# EAGLE board quahog-4-routed (EAGLE 7.6.0)
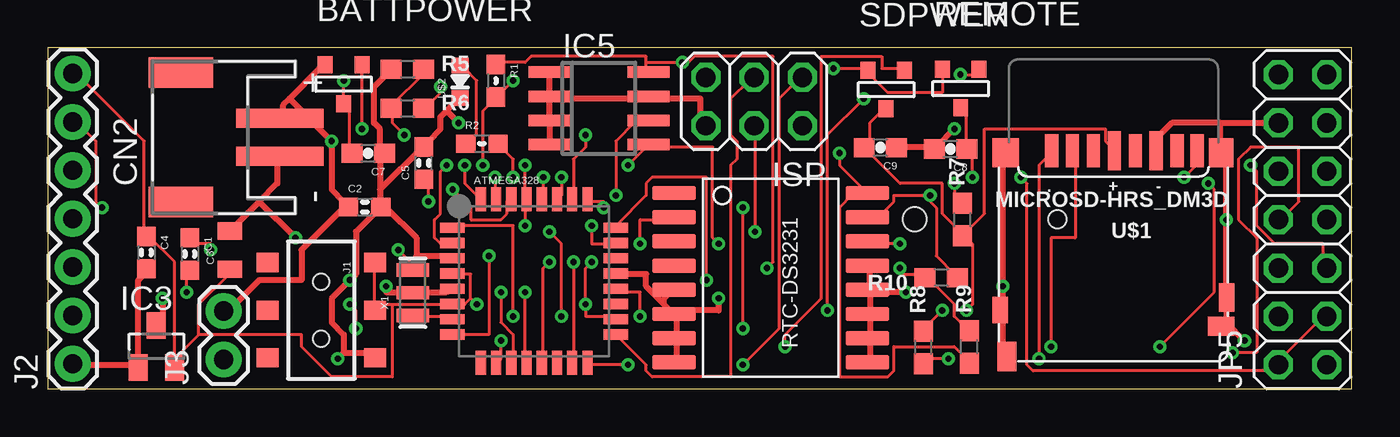
[diagram p0: board, top side]
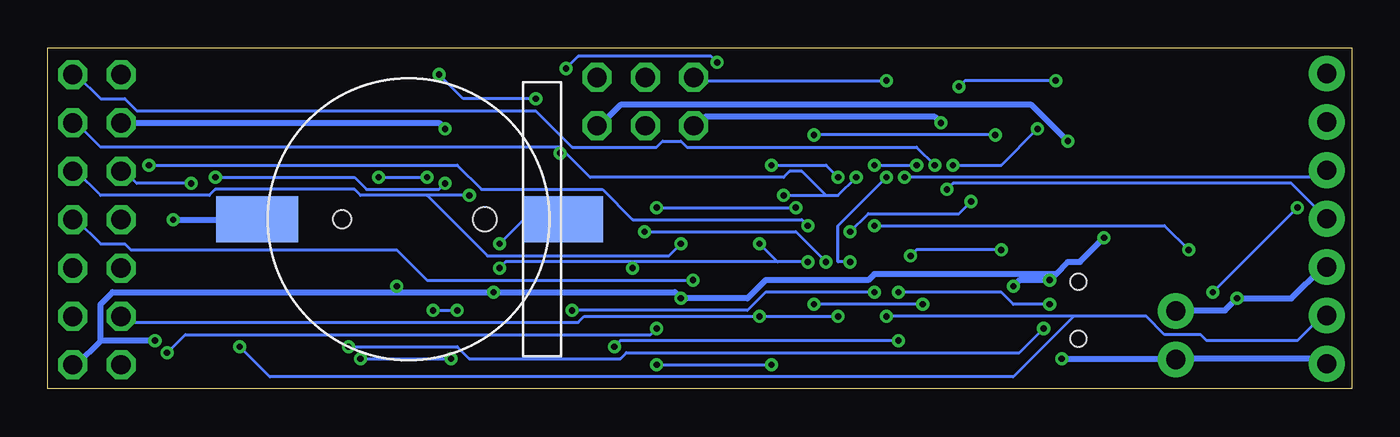
[diagram p1: board, bottom side, seen from below]

Size 68.5 x 17.92 mm. Coordinates in mm from the lower left corner, seen from the top.
Outline: 0,0 68.5,0 68.5,17.92 0,17.92 0,0
Copper layers (1*16): Top 0.0356mm / dielectric 1.5011mm / Bottom 0.0356mm
Design rules "oshpark-2layer": minimum track width 6mil, minimum drill 13mil, track to track 6mil, track to pad 6mil, pad to pad 6mil, via to via 6mil, smd to smd 6mil, copper to edge 15mil, drill to drill 6mil, minimum pad ring 7mil, minimum via ring 7mil, stop-mask expansion 2.5mil, vias tented up to drill 0mil, thermal gap 10mil
Net classes: 1 power: width 0.305 mm

## Footprints (pad centres in the part's own frame; a part is rotated, then mirrored left to right if it is on the bottom)
TQFP32-08 = smd 1.27 x 0.533: 1 -4.293,2.8; 2 -4.293,2; 3 -4.293,1.2; 4 -4.293,0.4; 5 -4.293,-0.4; 6 -4.293,-1.2; 7 -4.293,-2; 8 -4.293,-2.8; 17 4.293,-2.8; 18 4.293,-2; 19 4.293,-1.2; 20 4.293,-0.4; 21 4.293,0.4; 22 4.293,1.2; 23 4.293,2; 24 4.293,2.8 | smd 0.533 x 1.27: 9 -2.8,-4.293; 10 -2,-4.293; 11 -1.2,-4.293; 12 -0.4,-4.293; 13 0.4,-4.293; 14 1.2,-4.293; 15 2,-4.293; 16 2.8,-4.293; 25 2.8,4.293; 26 2,4.293; 27 1.2,4.293; 28 0.4,4.293; 29 -0.4,4.293; 30 -1.2,4.293; 31 -2,4.293; 32 -2.8,4.293
BATTCON_12MM_SMT = smd 2.4 x 4.3: P$1 0,11.96 | smd 2.4 x 4.2: P$2 0,-4.1 | hole 0.95: 0,7.5 | hole 1.25: 0,0
SOT-23 = smd 0.787 x 0.889: 1 0.025,-1.016; 2 -0.94,1.016; 3 0.991,1.016
0603-CAP = smd 1.016 x 0.965: 1 -0.85,0; 2 0.85,0
0805-CAP = smd 0.902 x 1.3: 1 -1,0; 2 1,0
0603-CAP' = smd 1.1 x 1: 1 -0.85,0; 2 0.85,0
JST-PH-2-SMT-RA = smd 1 x 4.6: 1 1,-3.7; 2 -1,-3.7 | smd 1.6 x 3.4: NC1 -3.4,1.5; NC2 3.4,1.5
SOT23 = smd 1 x 1.4: 1 -0.95,-1.1; 2 0.95,-1.1; 3 0,1.1
SO-08 = smd 0.6 x 2.2: 1 -1.905,-2.6; 2 -0.635,-2.6; 3 0.635,-2.6; 4 1.905,-2.6; 5 1.905,2.6; 6 0.635,2.6; 7 -0.635,2.6; 8 -1.905,2.6
2X03 = drill 1.016 octagon: 1 -2.54,-1.27; 2 -2.54,1.27; 3 0,-1.27; 4 0,1.27; 5 2.54,-1.27; 6 2.54,1.27
AYZ0202 = smd 1 x 1.15: 1 -2.5,2.825; 2 0,2.825; 3 2.5,2.825; 4 -2.5,-2.825; 5 0,-2.825; 6 2.5,-2.825 | hole 0.85: 1.5,0; -1.5,0
1X07 = drill 1.016 pad 1.88: 1 0,0; 2 2.54,0; 3 5.08,0; 4 7.62,0; 5 10.16,0; 6 12.7,0; 7 15.24,0
1X02 = drill 1.016 pad 1.88: 1 0,0; 2 2.54,0
2X07 = drill 1.016 octagon: 1 -7.62,-1.27; 2 -7.62,1.27; 3 -5.08,-1.27; 4 -5.08,1.27; 5 -2.54,-1.27; 6 -2.54,1.27; 7 0,-1.27; 8 0,1.27; 9 2.54,-1.27; 10 2.54,1.27; 11 5.08,-1.27; 12 5.08,1.27; 13 7.62,-1.27; 14 7.62,1.27
0603-RES = smd 1.016 x 0.965: 1 -0.85,0; 2 0.85,0
0603-NO = smd 1.1 x 1: 1 -0.85,0; 2 0.85,0
DS3231 = smd 0.762 x 2.286: 1 -4.445,-5.08; 2 -3.175,-5.08; 3 -1.905,-5.08; 4 -0.635,-5.08; 5 0.635,-5.08; 6 1.905,-5.08; 7 3.175,-5.08; 8 4.445,-5.08; 9 4.445,5.08; 10 3.175,5.08; 11 1.905,5.08; 12 0.635,5.08; 13 -0.635,5.08; 14 -1.905,5.08; 15 -3.175,5.08; 16 -4.445,5.08
DM3D = smd 0.7 x 1.75: CD/DAT3 8.15,0.45; CLK 4.85,0.45; CMD 7.05,0.45; DAT0 2.65,0.45; DAT1 1.6,0.45; DAT2 9.25,0.45 | smd 0.8 x 1.5: GND1 0.05,8.15 | smd 0.8 x 1.4: GND2 11.95,8.8 | smd 1.4 x 1.5: GND3 11.65,0.55 | smd 1.3 x 1.5: GND4 0.35,0.55 | smd 1 x 1.55: SW_A 11.6,11.25 | smd 1.4 x 1: SW_B 0.35,9.65 | smd 0.7 x 2.032: VDD 5.95,0.45; VSS 3.75,0.45
0603-LED = smd 0.8 x 0.9: MINUS -0.85,0; PLUS 0.85,0
RESONATOR-SMD = smd 0.7 x 1.7: 1 -1.2,0; 2 0,0; 3 1.2,0

## Placement (x,y rotation side)
ATMEGA328  ATMega-328  [TQFP32-08]  25.55,5.66 0 top
BAT  CR1220  [BATTCON_12MM_SMT]  45.54,8.92 90 bottom
BATTPOWER  FDN340P  [SOT-23]  15.52,16 0 top
C1  0.1  [0603-CAP]  7.47,7.09 270 top
C2  1u  [0603-CAP]  16.66,9.55 0 top
C3  10u  [0805-CAP]  9.58,7.29 90 top
C4  0.1  [0603-CAP]  5.18,7.16 270 top
C5  0.1  [0603-CAP]  19.76,11.86 90 top
C7  0.1uF  [0603-CAP']  16.84,12.37 180 top
C8  0.1uF  [0603-CAP']  47.42,12.6 180 top
C9  0.1uF  [0603-CAP']  43.74,12.67 180 top
CN2  [JST-PH-2-SMT-RA]  8.51,13.21 90 top
IC3  MCP1703CB  [SOT23]  5.72,2.24 0 top
IC5  24AA128SN  [SO-08]  28.96,14.73 270 top
ISP  [2X03]  37.11,15.09 180 top
J1  AYZ0202  [AYZ0202]  14.38,4.14 270 top
J2  [1X07]  1.32,1.32 90 top
J3  [1X02]  9.25,1.55 90 top
JP5  [2X07]  65.91,8.89 90 top
R1  10k  [0603-RES]  23.55,16.18 270 top
R2  1k5  [0603-RES]  22.81,12.88 0 top
R5  100K  [0603-NO]  18.9,16.79 0 top
R6  100K  [0603-NO]  18.9,14.73 0 top
R7  10K  [0603-NO]  48.06,8.89 90 top
R8  10K  [0603-NO]  46,2.18 90 top
R9  1.4K  [0603-NO]  48.41,2.21 90 top
R10  1.4K  [0603-NO]  46.94,5.84 180 top
REMOTE  FDN340P  [SOT-23]  47.93,15.77 0 top
RTC-DS3231  DS3231  [DS3231]  37.97,5.84 270 top
SDPWER  FDN340P  [SOT-23]  44.02,15.72 0 top
U$1  MICROSD-HRS_DM3D  [DM3D]  61.98,12.95 180 top
U$2  LED0603  [0603-LED]  21.67,16.13 90 top
X1  16 MHz  [RESONATOR-SMD]  19.18,5.05 90 top

## Library data of the parts
ATMEGA328 C1-C5 R1 R2 U$2 = LowPowerLab
BAT J1 = SparkFunNew
BATTPOWER REMOTE SDPWER = zetex; OC_FARNELL: unknown; OC_NEWARK: unknown
C7-C9 X1 = SparkFun
CN2 = adafruit
IC3 = linear
IC5 = microchip; MF: MICROCHIP; MPN: 24AA128-I/SN; OC_FARNELL: unknown; OC_NEWARK: 92C6842
ISP JP5 = pinhead
J2 J3 = SparkFun-Connectors
R5-R10 = microbuilder
RTC-DS3231 = _lh-library
U$1 = hrs_DM3D-SF

## Nets
A0: ATMEGA328.23 JP5.5
A1: ATMEGA328.24 JP5.7
A2: ATMEGA328.25 JP5.8
A3: ATMEGA328.26 R5.2 R6.1
A6: ATMEGA328.19
A7: ATMEGA328.22
AREF: ATMEGA328.20 C5.1 JP5.4
D0_RX: ATMEGA328.30 J2.4
D1_TX: ATMEGA328.31 J2.5
D2: ATMEGA328.32 JP5.13
D3: ATMEGA328.1 J2.2 JP5.10
D4: ATMEGA328.2 BATTPOWER.3
D5: ATMEGA328.9
D5/RTC: RTC-DS3231.3
D6: ATMEGA328.10 SDPWER.3
D7: ATMEGA328.11 U$1.CD/DAT3
D8: ATMEGA328.12 REMOTE.3
D9: ATMEGA328.13 R2.2
D10: JP5.6
D10_SS: ATMEGA328.14
D11_MOSI: ATMEGA328.15 ISP.4
D12_MISO: ATMEGA328.16 ISP.1
D13_SCK: ATMEGA328.17 ISP.3
GND [power]: ATMEGA328.3 ATMEGA328.5 ATMEGA328.21 BAT.P$1 C2.2 C3.2 C4.2 C5.2 C7.1 C8.2 C9.1 CN2.2 IC3.1 IC5.1 IC5.2 IC5.3 IC5.4 IC5.7 ISP.6 J1.3 J2.1 J3.1 JP5.1 JP5.12 R5.1 RTC-DS3231.5 RTC-DS3231.6 RTC-DS3231.7 RTC-DS3231.8 RTC-DS3231.9 RTC-DS3231.10 RTC-DS3231.11 RTC-DS3231.12 RTC-DS3231.13 U$1.GND1 U$1.GND2 U$1.GND3 U$1.GND4 U$1.SW_A U$1.SW_B U$1.VSS U$2.MINUS X1.2
MISO: U$1.DAT0
MOSI: U$1.CMD
N$1: ATMEGA328.7 X1.1
N$2: R2.1 U$2.PLUS
N$4: C9.2 R7.1 R8.2 SDPWER.1 U$1.VDD
N$7: C8.1 JP5.2 JP5.3 REMOTE.1
N$15: BATTPOWER.1 C7.2 R6.2
N$16: R7.2 U$1.DAT1
N$18: R8.1 U$1.DAT2
N$20: C1.2 J2.6
N$21: ATMEGA328.8 X1.3
PWR [power]: BATTPOWER.2 C2.1 CN2.1 IC3.3 ISP.2 J2.3 J3.2
RST: ATMEGA328.29 C1.1 ISP.5 R1.2
RTC_BATT: BAT.P$2 RTC-DS3231.14
SCK: U$1.CLK
SCL: ATMEGA328.28 IC5.6 JP5.11 R9.1 RTC-DS3231.16
SDA: ATMEGA328.27 IC5.5 JP5.9 R10.1 RTC-DS3231.15
VBAT [power]: JP5.14
VCC: ATMEGA328.4 ATMEGA328.6 ATMEGA328.18 C3.1 C4.1 IC3.2 IC5.8 J1.1 J1.2 J2.7 R1.1 R9.2 R10.2 REMOTE.2 RTC-DS3231.2 SDPWER.2

## Tracks (layer width: path | path; a pad name or v marks a point on that pad's centre or on a via)
A0  (via drill 0.33)
  Top 0.152: v28.57,8.57 28.57,7.62 29.85,7.62 ATMEGA328.23 | v63.18,11.75 63.5,11.43 63.5,8.57 64.45,7.62 66.99,7.62 66.99,6.35 JP5.5
  Bottom 0.152: v28.57,8.57 28.89,8.89 37.78,8.89 39.37,10.48 45.72,10.48 46.99,11.75 v63.18,11.75
A1  (via drill 0.33)
  Top 0.152: v34.61,5.71 34.61,11.11 31.75,11.11 31.43,10.79 31.43,10.16 29.85,8.57 ATMEGA328.24
  Bottom 0.152: v34.61,5.71 48.58,5.71 50.16,7.3 64.13,7.3 64.45,7.62 65.72,7.62 66.99,8.89 JP5.7
A2  (via drill 0.33)
  Top 0.152: v29.21,9.53 29.21,9.84 28.57,9.84 ATMEGA328.25 | v36.51,3.17 v36.51,9.53 | v62.23,1.91 63.5,1.91 63.5,7.94 62.55,8.89 62.55,12.06 63.18,12.7 65.72,12.7 65.72,9.84 64.77,8.89 JP5.8
  Bottom 0.152: v36.51,9.53 v29.21,9.53 | v36.51,3.17 36.83,2.86 61.28,2.86 v62.23,1.91
A3  (via drill 0.33)
  Top 0.152: R5.2 19.68,16.51 18.1,14.92 R6.1 18.1,14.61 18.1,13.97 v18.73,13.34 | v28.26,13.34 28.26,12.7 27.62,12.06 27.62,10.16 ATMEGA328.26
  Bottom 0.152: v18.73,13.34 v28.26,13.34
AREF  (via drill 0.33)
  Top 0.152: v20,9.84 20,10.79 C5.1 | v26.35,8.26 26.99,7.62 v26.99,3.81 | v31.11,3.81 31.11,5.08 29.85,5.08 ATMEGA328.20
  Bottom 0.152: v20,9.84 20.64,9.21 25.4,9.21 v26.35,8.26 | v26.99,3.81 v31.11,3.81 40.32,3.81 40.64,3.49 64.13,3.49 64.45,3.81 JP5.4
D0_RX  (via drill 0.33)
  Top 0.152: v21.27,10.48 22.22,9.53 22.22,8.89 23.81,8.89 24.13,9.21 24.13,9.84 ATMEGA328.30
  Bottom 0.152: v21.27,10.48 20.95,10.79 3.17,10.79 J2.4
D1_TX  (via drill 0.33)
  Top 0.152: v23.49,11.11 23.49,10.16 ATMEGA328.31
  Bottom 0.152: v23.49,11.11 1.91,11.11 1.59,11.43 J2.5
D2  (via drill 0.33)
  Top 0.152: v21.91,11.75 21.91,10.79 22.54,10.16 ATMEGA328.32
  Bottom 0.152: v21.91,11.75 22.86,12.7 34.93,12.7 35.24,13.02 36.2,13.02 36.51,12.7 40.96,12.7 42.86,14.61 63.82,14.61 64.45,15.24 65.72,15.24 66.99,16.51 JP5.13
D3  (via drill 0.33)
  Top 0.152: v24.45,3.81 24.45,8.57 21.27,8.57 ATMEGA328.1 | v60.96,10.79 61.28,10.48 61.28,5.08 v58.42,2.22
  Bottom 0.152: 14.61,3.81 10.79,3.81 9.84,2.86 7.94,2.86 7.62,2.54 2.86,2.54 1.59,3.81 J2.2 | 14.61,3.81 v24.45,3.81 | v60.96,10.79 63.82,10.79 64.45,11.43 JP5.10 | v58.42,2.22 56.83,0.64 17.78,0.64 14.61,3.81
D4  (via drill 0.33)
  Top 0.152: v16.51,13.65 BATTPOWER.3 | v20.95,11.75 20.64,11.43 20.64,9.21 20.32,8.89 20.32,7.94 20.64,7.62 20.95,7.62 ATMEGA328.2
  Bottom 0.152: v16.51,13.65 18.41,11.75 v20.95,11.75
D6  (via drill 0.33)
  Top 0.152: v38.73,2.22 38.73,2.86 40.64,4.76 40.64,17.46 43.82,17.46 43.82,16.83 44.77,16.83 SDPWER.3 | v23.81,2.54 23.81,1.59 ATMEGA328.10
  Bottom 0.152: v38.73,2.22 38.42,2.54 v23.81,2.54
D7  (via drill 0.33)
  Top 0.152: v23.81,5.08 23.81,3.49 24.45,2.86 24.45,1.59 ATMEGA328.11 | v15.88,4.45 16.19,4.13 v16.19,3.17 | v52.71,2.22 52.71,7.94 53.98,7.94 53.98,12.38 U$1.CD/DAT3
  Bottom 0.152: v23.81,5.08 18.41,5.08 17.78,4.45 v15.88,4.45 | v16.19,3.17 17.46,1.91 38.1,1.91 38.42,1.59 46.36,1.59 46.99,2.22 v52.71,2.22
D8  (via drill 0.33)
  Top 0.152: v47.94,16.51 48.9,16.51 REMOTE.3 | v42.86,15.24 40.96,13.34 v40.96,4.13 | v25.08,5.08 25.08,1.59 ATMEGA328.12
  Bottom 0.152: v47.94,16.51 46.67,15.24 v42.86,15.24 | v40.96,4.13 31.75,4.13 30.8,5.08 v25.08,5.08
D9  (via drill 0.33)
  Top 0.152: v24.45,11.11 24.45,12.06 23.81,12.7 R2.2 | v26.35,6.67 26.04,6.35 26.04,1.59 ATMEGA328.13
  Bottom 0.152: v24.45,11.11 26.99,8.57 26.99,6.67 v26.35,6.67
D11_MOSI  (via drill 0.33)
  Top 0.152: v27.62,6.67 27.62,1.59 ATMEGA328.15 | v37.15,8.26 37.15,13.65 ISP.4
  Bottom 0.152: v27.62,6.67 29.21,8.26 v37.15,8.26
D12_MISO  (via drill 0.33)
  Top 0.152: v30.48,1.27 28.57,1.27 ATMEGA328.16 | v36.51,1.27 38.42,3.17 38.42,15.24 39.37,16.19 ISP.1
  Bottom 0.152: v36.51,1.27 v30.48,1.27
D13_SCK
  Top 0.152: ATMEGA328.17 31.43,1.27 31.43,0.95 31.75,0.64 35.88,0.64 35.88,11.75 36.2,12.06 36.2,13.02 35.88,13.34 35.88,15.24 36.83,16.19 ISP.3
GND  (via drill 0.33)
  Top 0.305: C9.1 44.77,12.7 46.36,12.7 C8.2 46.67,12.7 v47.62,13.65 | U$1.SW_A 50.16,1.91 50.16,4.13 U$1.GND2 50.16,4.45 v50.16,5.4 50.16,12.38 U$1.GND3 | RTC-DS3231.8 33.02,1.59 33.02,2.54 RTC-DS3231.7 33.02,2.86 33.02,3.81 RTC-DS3231.6 | RTC-DS3231.6 32.39,4.45 | 32.39,4.45 31.43,5.4 31.43,6.03 29.85,6.03 ATMEGA328.21 | 32.39,4.45 32.39,4.76 32.7,5.08 RTC-DS3231.5 | RTC-DS3231.9 43.18,1.59 43.18,2.54 RTC-DS3231.10 43.18,2.86 43.18,3.81 RTC-DS3231.11 43.18,4.13 43.18,5.08 | RTC-DS3231.13 43.18,6.35 43.18,5.4 RTC-DS3231.12 43.18,5.08 | 61.91,3.49 61.91,4.76 U$1.GND1 61.91,5.08 v61.91,8.89 61.91,12.38 U$1.GND4 61.6,12.7 61.6,13.97 | 61.6,13.97 59.05,13.97 58.42,13.34 58.42,12.7 U$1.VSS | 61.91,3.49 v62.87,2.54 | 61.91,3.49 U$1.SW_B | v45.09,5.08 43.18,5.08 | v35.24,4.76 35.24,4.13 33.02,4.13 RTC-DS3231.6 | 61.6,13.97 JP5.12 | 4.76,1.27 4.76,5.71 5.08,6.03 C4.2 | 4.76,1.27 1.59,1.27 J2.1 | 4.76,1.27 IC3.1 | IC5.4 26.35,13.02 26.35,13.97 IC5.3 26.35,14.29 26.35,15.24 IC5.2 | IC5.1 26.35,16.51 26.35,15.56 IC5.2 | ISP.6 34.29,13.97 34.29,15.24 31.75,15.24 IC5.7 31.43,15.24 26.67,15.24 IC5.2 | 11.11,9.84 12.06,10.79 12.06,12.06 CN2.2 | 11.11,9.84 9.84,8.57 C3.2 | 20.95,14.61 20.64,14.29 20.64,13.65 20,13.02 C5.2 19.68,12.7 17.46,10.48 | 20.95,14.61 21.59,15.24 U$2.MINUS | ATMEGA328.5 20.95,5.08 19.37,5.08 X1.2 19.05,5.08 17.78,5.08 v17.78,5.4 | 17.46,10.48 17.46,12.06 C7.1 17.46,12.38 17.46,13.65 17.14,13.97 17.14,15.88 17.78,16.51 R5.1 | 17.46,10.48 17.46,9.84 C2.2 | 15.56,1.91 17.14,1.91 J1.3 | 15.56,1.91 15.56,2.86 14.92,3.49 14.92,4.76 v15.88,5.71 16.19,6.03 16.19,8.26 17.46,9.53 C2.2
  Top 0.305: ATMEGA328.3 20.95,6.99 19.37,6.99 19.37,7.94 17.78,9.53 C2.2 | v13.02,7.94 11.11,9.84 | 20.95,14.61 v21.59,13.97 | 15.56,1.91 v15.24,1.59
  Bottom 0.305: v47.62,13.65 47.94,13.97 JP5.12 | 65.72,2.54 66.99,1.27 JP5.1 | v62.87,2.54 65.72,2.54 | 50.16,5.08 65.09,5.08 65.72,4.45 65.72,2.54 | 50.16,5.08 v45.09,5.08 35.56,5.08 v35.24,4.76 31.75,4.76 30.8,5.71 25.4,5.71 25.08,6.03 15.56,6.03 | v61.91,8.89 57.79,8.89 BAT.P$1 | 50.16,5.08 v50.16,5.4 | J2.1 1.59,1.59 9.21,1.59 J3.1 9.52,1.59 v15.24,1.59 | v17.78,5.4 17.46,5.71 v15.88,5.71 15.56,6.03 | v13.02,7.94 14.29,6.67 14.92,6.67 15.56,6.03 | v21.59,13.97 21.91,14.29 33.97,14.29 34.29,13.97 ISP.6
N$1
  Top 0.152: ATMEGA328.7 20.95,3.81 19.37,3.81 X1.1
N$2
  Top 0.152: U$2.PLUS 21.91,16.83 22.54,16.19 22.54,13.34 22.22,13.02 R2.1
N$4  (via drill 0.33)
  Top 0.152: SDPWER.1 43.82,14.61 43.18,13.97 43.18,12.7 C9.2 43.18,12.38 44.77,10.79 46.99,10.79 46.99,9.21 47.94,8.26 R7.1 | v46.99,4.13 46.04,3.17 R8.2 | v48.26,4.13 48.58,4.45 48.58,7.62 48.26,7.94 R7.1 | U$1.VDD 55.88,12.7 55.56,13.02 55.56,13.65 49.21,13.65 49.21,9.21 48.26,8.26 R7.1
  Bottom 0.152: v48.26,4.13 v46.99,4.13
N$7  (via drill 0.33)
  Top 0.152: REMOTE.1 48.26,14.61 48.26,12.7 C8.1 48.58,12.38 v48.58,11.11 | v51.12,11.11 51.44,10.79 51.44,1.27 51.75,0.95 64.45,0.95 64.45,1.27 JP5.2 64.77,1.27 64.77,1.59 66.99,3.81 JP5.3
  Bottom 0.152: v51.12,11.11 v48.58,11.11
N$15  (via drill 0.33)
  Top 0.152: C7.2 15.88,12.38 15.88,14.61 15.56,14.92 BATTPOWER.1 15.56,15.24 v15.56,16.19 | v20.64,15.88 20.64,15.56 20,14.92 R6.2
  Bottom 0.152: v20.64,15.88 20.32,16.19 v15.56,16.19
N$16  (via drill 0.33)
  Top 0.152: v47.62,10.79 47.62,10.16 47.94,9.84 R7.2 | v59.69,11.11 60.32,11.75 60.32,12.38 U$1.DAT1
  Bottom 0.152: v47.62,10.79 47.94,10.48 51.75,10.48 52.39,11.11 v59.69,11.11
N$18  (via drill 0.33)
  Top 0.152: v47.31,1.59 46.04,1.59 R8.1 | v52.07,1.59 52.07,11.75 52.71,12.38 U$1.DAT2
  Bottom 0.152: v52.07,1.59 v47.31,1.59
N$20  (via drill 0.33)
  Top 0.152: v7.3,5.08 7.3,6.03 C1.2 | v2.86,9.53 2.54,9.84 2.54,13.02 1.59,13.97 J2.6
  Bottom 0.152: v2.86,9.53 v7.3,5.08
N$21  (via drill 0.33)
  Top 0.152: v23.18,6.99 23.18,2.86 21.27,2.86 ATMEGA328.8 | v18.41,7.3 19.05,6.67 19.05,6.35 X1.3
  Bottom 0.152: v23.18,6.99 22.86,7.3 v18.41,7.3
PWR  (via drill 0.33)
  Top 0.305: v6.03,4.76 6.03,3.81 5.72,3.49 IC3.3 | 12.7,15.24 12.38,14.92 12.38,14.29 CN2.1 | 12.7,15.24 14.29,16.83 BATTPOWER.2 | 12.7,15.24 v14.92,13.02 14.92,10.48 15.56,9.84 C2.1 15.56,9.53 13.33,7.3 13.33,5.71 11.11,5.71 9.52,4.13 J3.2
  Bottom 0.305: J3.2 9.21,4.13 6.67,4.13 v6.03,4.76 3.17,4.76 1.59,6.35 J2.3 | v14.92,13.02 16.83,14.92 38.42,14.92 39.37,13.97 ISP.2
RST  (via drill 0.33)
  Top 0.152: v24.45,16.19 23.81,15.56 R1.2 23.49,15.24 22.86,14.61 v22.86,11.75 | v8.57,7.3 8.57,7.62 7.62,7.62 C1.1 | v25.08,8.57 25.08,9.84 ATMEGA328.29 25.08,10.16 v25.08,11.75
  Bottom 0.152: v24.45,16.19 34.29,16.19 ISP.5 | v8.57,7.3 9.84,8.57 v25.08,8.57 | v25.08,11.75 v22.86,11.75
RTC_BATT  (via drill 0.33)
  Top 0.152: v44.77,7.62 43.18,7.62 RTC-DS3231.14
  Bottom 0.152: v44.77,7.62 43.5,8.89 41.59,8.89 BAT.P$2
SCL  (via drill 0.33)
  Top 0.152: R9.1 48.26,1.59 47.62,2.22 44.45,2.22 44.45,0.95 44.13,0.64 41.59,0.64 41.59,9.53 42.23,10.16 42.86,10.16 RTC-DS3231.16 41.59,11.75 v41.59,12.38 | v26.04,11.11 26.04,10.16 ATMEGA328.28 | v29.85,10.16 29.85,13.02 30.8,13.97 31.43,13.97 IC5.6
  Bottom 0.152: v26.04,11.11 26.99,10.16 27.62,10.16 | v29.85,10.16 27.62,10.16 | 41.28,12.38 40.01,11.11 29.85,11.11 29.53,11.43 28.89,11.43 27.62,10.16 | 41.28,12.38 41.59,12.7 65.72,12.7 66.99,13.97 JP5.11 | 41.28,12.38 v41.59,12.38
SDA  (via drill 0.33)
  Top 0.152: v26.99,11.11 26.99,10.16 ATMEGA328.27 | v30.48,11.75 31.43,12.7 IC5.5 31.75,12.7 34.93,12.7 34.93,7.94 v35.24,7.62 | 46.04,10.16 46.67,9.53 46.67,6.99 47.62,6.03 R10.1 | 46.04,10.16 44.45,10.16 44.45,9.84 43.82,9.21 43.18,9.21 RTC-DS3231.15 | 46.04,10.16 v46.36,10.16
  Bottom 0.152: v26.99,11.11 27.62,11.75 v30.48,11.75 | v46.36,10.16 48.58,10.16 | 48.58,10.16 52.07,10.16 52.39,10.48 59.69,10.48 60.01,10.16 65.72,10.16 66.99,11.43 JP5.9 | v35.24,7.62 35.88,6.99 45.4,6.99 48.58,10.16
VCC  (via drill 0.33)
  Top 0.152: 6.67,1.59 6.67,1.27 IC3.2 6.67,1.59 | 6.67,1.59 6.67,6.67 5.4,7.94 C4.1 5.08,8.26 5.08,13.02 1.59,16.51 J2.7 | 7.94,2.86 7.94,4.45 9.52,6.03 C3.1 | 6.67,1.59 7.94,2.86 | REMOTE.2 46.99,15.56 44.13,15.56 43.18,16.51 SDPWER.2 42.86,16.83 v41.28,16.83 | 31.43,17.14 31.43,16.83 IC5.8 | 31.43,17.14 31.43,17.46 25.4,17.46 25.08,17.14 23.81,17.14 R1.1 | 31.43,17.14 v33.34,17.14 33.66,17.14 33.97,17.46 38.1,17.46 38.1,6.67 v37.78,6.35 | R9.2 48.26,3.17 47.62,3.81 47.62,4.45 46.36,5.71 R10.2 46.04,6.03 44.77,6.03 v44.77,6.35 | J1.1 17.14,6.35 17.14,4.45 J1.2 17.46,4.45 18.1,4.45 | 18.1,4.45 20.95,4.45 ATMEGA328.6 21.27,4.45 21.91,4.45 22.22,4.76 | 22.22,4.76 22.22,6.03 21.27,6.03 ATMEGA328.4 | 22.22,4.76 v22.54,4.45 | ATMEGA328.18 29.85,3.81 28.26,3.81 v28.26,4.45 28.26,6.35 v28.57,6.67 | v31.11,7.62 31.11,8.89 32.7,8.89 RTC-DS3231.2 | 7.94,2.86 13.33,2.86 13.33,2.22 14.92,0.64 18.1,0.64 18.1,4.45
  Bottom 0.152: v41.28,16.83 40.64,17.46 33.66,17.46 v33.34,17.14 | v22.54,4.45 v28.26,4.45 | 30.16,6.67 v31.11,7.62 | v28.57,6.67 30.16,6.67 | v44.77,6.35 44.45,6.67 37.78,6.67 | 30.16,6.67 37.78,6.67 | 37.78,6.67 v37.78,6.35